# Altium PCB PCB EMS.PcbDoc
Units mm, origin at the board's own origin, x right, y up, seen from the top; angles counter-clockwise.
Board outline 25 x 25 mm, 2 copper layers (Top Layer, Bottom Layer), stack 0.325 mm thick; 19 components, 10 nets, 37 pads, 10 vias.
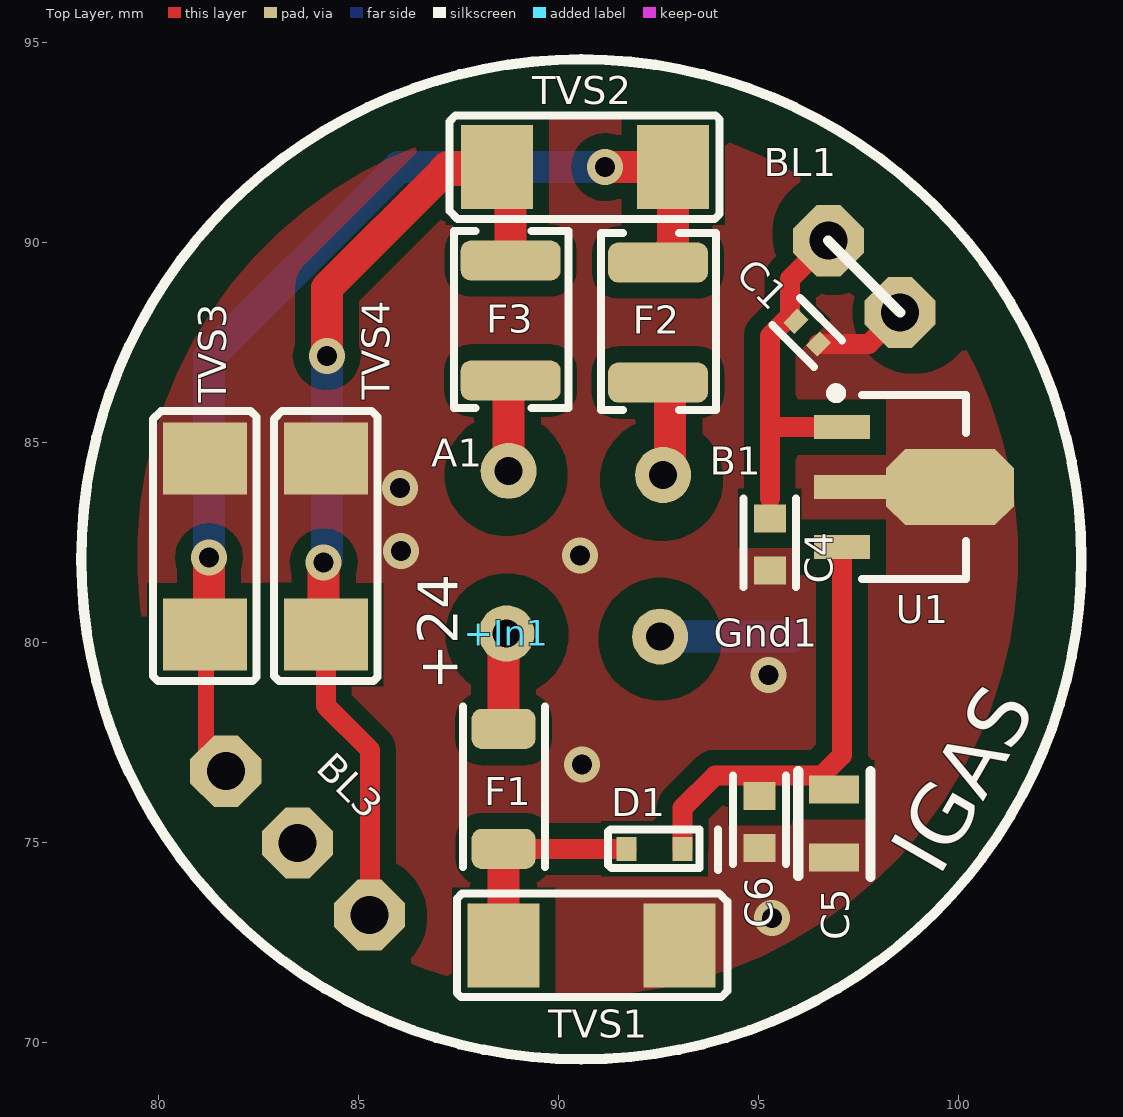
[diagram p0: Top Layer view]
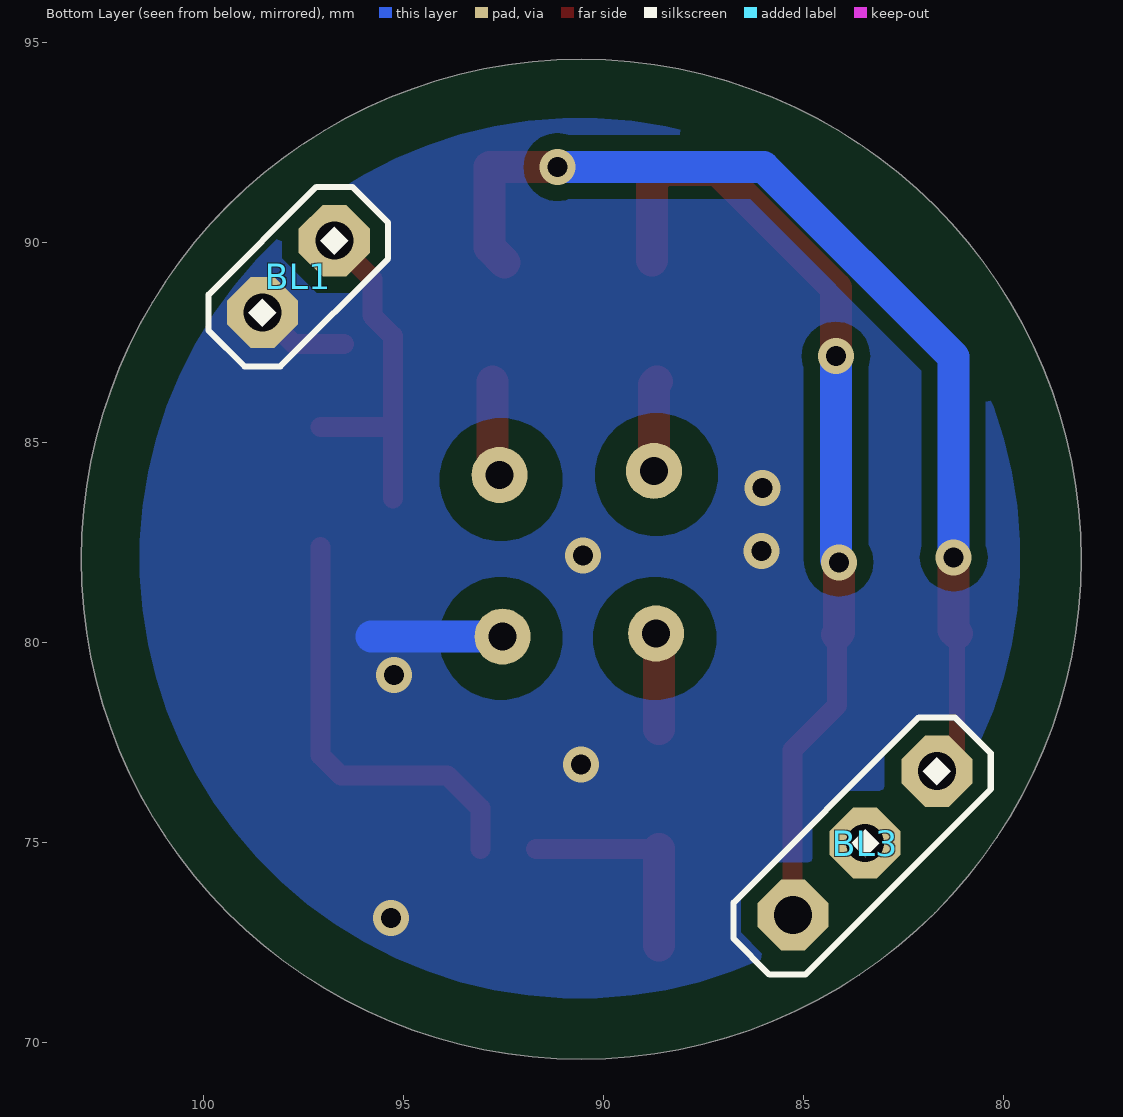
[diagram p1: Bottom Layer view, seen from below]
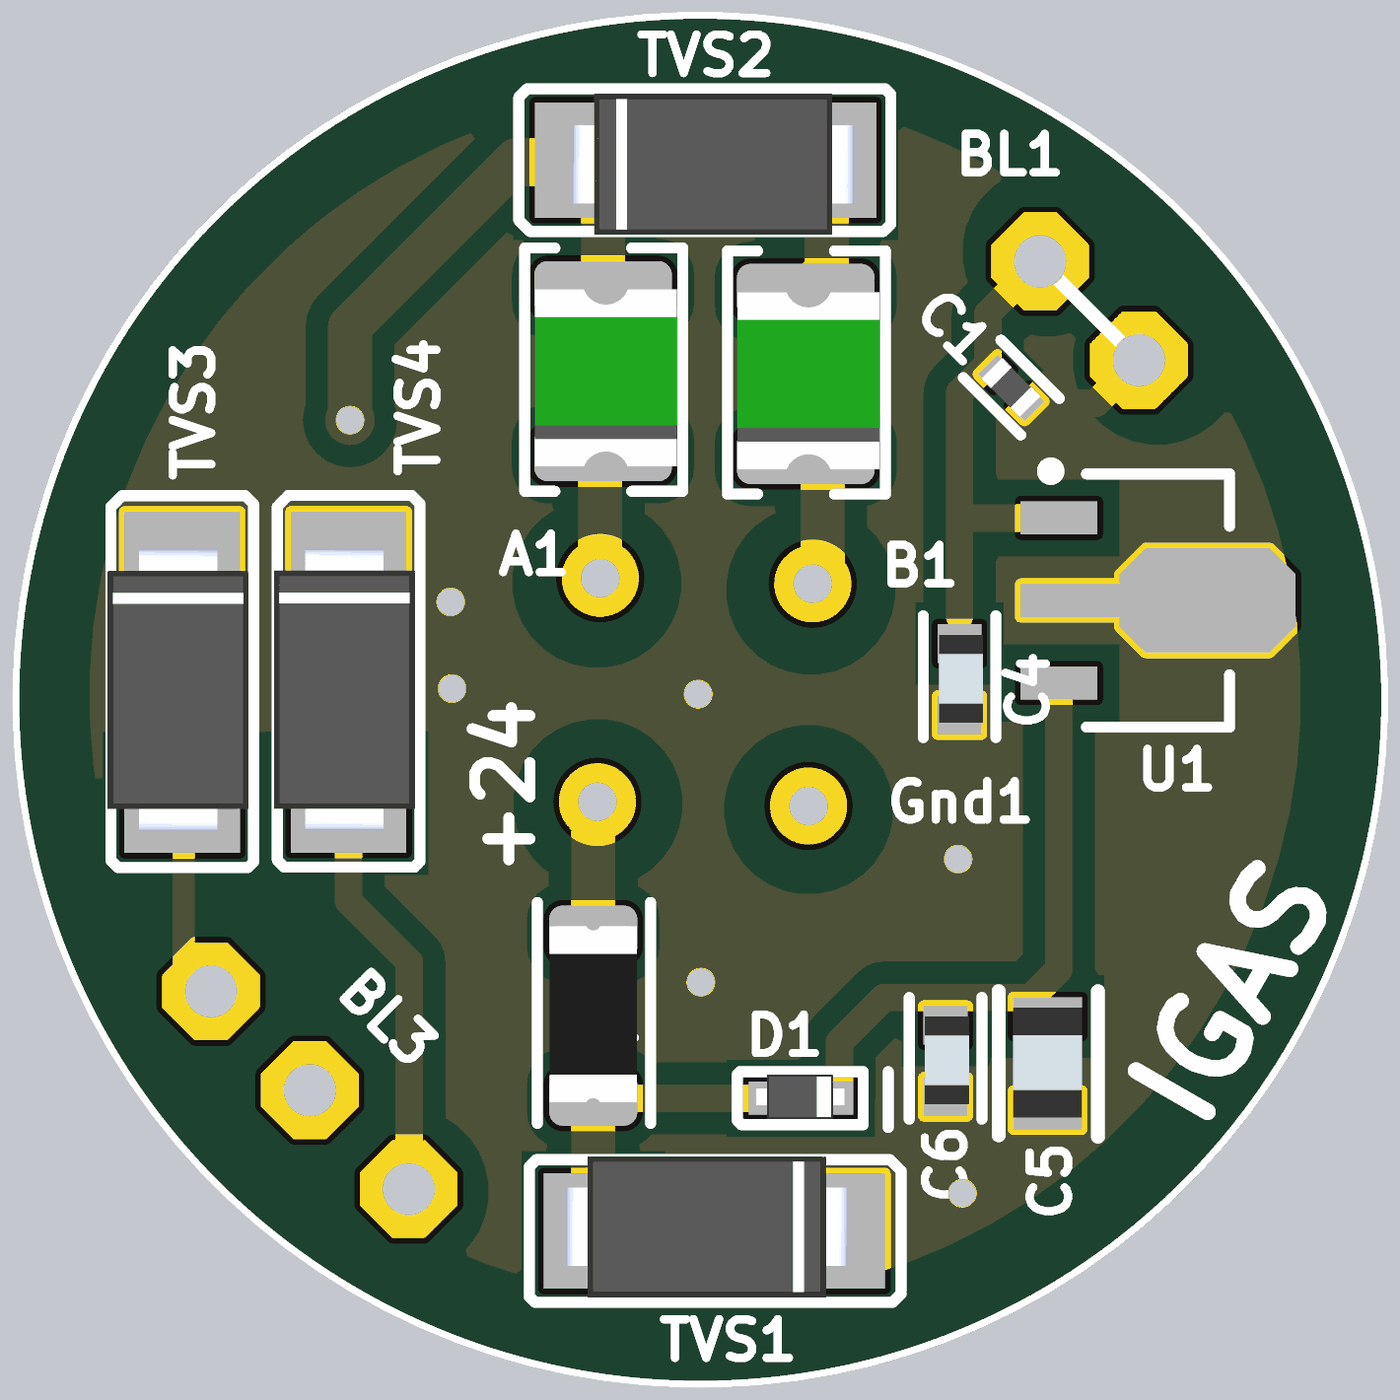
[diagram p2: 3D render of the assembled board from above, using the file's embedded part models]

## Layer stack, top to bottom
Top Solder: solder mask 0.0102, Solder Resist, Dk 3.5
Top Layer: signal copper 0.0356
Dielectric 1: core 0.254, FR-4, Dk 4.2
Bottom Layer: signal copper 0.0356
Bottom Solder: solder mask 0.0102, Solder Resist, Dk 3.5

## Board outline
78.064,82.067 ccw(c90.564,82.067) 90.564,69.567 ccw(c90.564,82.067) 103.064,82.067 ccw(c90.564,82.067) 90.564,94.567 ccw(c90.564,82.067)

## Design rules (kind name [scope] priority, off if disabled: settings)
AssemblyTestPointUsage [All] p1 off:
AssemblyTestpoint [All] p1 off: testpointundercomponent=TRUE minsize=1.016 maxsize=2.54 preferedsize=1.524 minholesize=0 maxholesize=1.016 preferedholesize=0.813 testpointgrid=0.025 usegrid=TRUE gridtolerance=0 allowsidetop=TRUE allowsidebottom=TRUE
Clearance Clearance_1 [All] p1: gap=0.4 ignorepadtopadclearanceinfootprint=FALSE
ComponentClearance [All] p1 off: gap=0.254 collisioncheckmode=3 verticalgap=0.254 showdistances=FALSE
DiffPairsRouting [All] p1 off: maxlimit=0.254 minlimit=0.254 mostfreqgap=0.254 toplayer_minwidth=0.381 toplayer_maxwidth=0.381 toplayer_prefwidth=0.381 bottomlayer_minwidth=0.381 bottomlayer_maxwidth=0.381 bottomlayer_prefwidth=0.381 maxuncoupledlength=12.7
FabricationTestPointUsage [All] p1 off: valid=0 allowmultiple=FALSE
FabricationTestpoint [All] p1 off: side=3 testpointundercomponent=TRUE minsize=1.016 maxsize=2.54 preferedsize=1.524 minholesize=0 maxholesize=1.016 preferedholesize=0.813 testpointgrid=0.025 allowsidetop=TRUE allowsidebottom=TRUE usegrid=TRUE gridtolerance=0
FanoutControl Fanout_BGA [IsBGA] p1 off: bgadir=Out bgaviamode=Centered fanoutstyle=Auto fanoutdirection=Alternating viagrid=0.025 // Fanout_BGA (Default Rule)
FanoutControl Fanout_LCC [IsLCC] p2 off: bgadir=Out bgaviamode=Centered fanoutstyle=Auto fanoutdirection=Alternating viagrid=0.025 // Fanout_LCC (Default Rule)
FanoutControl Fanout_SOIC [IsSOIC] p3 off: bgadir=Out bgaviamode=Centered fanoutstyle=Auto fanoutdirection=Alternating viagrid=0.025 // Fanout_SOIC (Default Rule)
FanoutControl Fanout_Small [(CompPinCount < 5)] p4 off: bgadir=Out bgaviamode=Centered fanoutstyle=Auto fanoutdirection=OutThenIn viagrid=0.025 // Fanout_Small (Default Rule)
FanoutControl Fanout_Default [All] p5 off: bgadir=Out bgaviamode=Centered fanoutstyle=Auto fanoutdirection=Alternating viagrid=0.025 // Fanout_Default (Default Rule)
Height [All] p1 off: minheight=0 maxheight=25.4 prefheight=12.7
HoleToHoleClearance [All] p1 off: gap=0.254 allowstackedmicrovias=TRUE
LayerPairs [All] p1 off: enforce=TRUE
MinimumSolderMaskSliver [All] p1 off: minsoldermaskwidth=0.254
NetAntennae [All] p1 off: netantennaetolerance=0
PasteMaskExpansion [All] p1 off: expansion=0
PlaneClearance [All] p1: clearance=0.6
PlaneConnect [All] p1: planeconnectstyle=Direct reliefexpansion=0.508 reliefentries=4 reliefconductorwidth=0.254 reliefairgap=0.254
PolygonConnect [All] p1: connectstyle=Direct reliefconductorwidth=0.5 reliefentries=4 polygonreliefangle="90 Angle" airgapwidth=0.5
RoutingCorners [All] p1 off: cornerstyle=45-Degree minsetback=2.54 maxsetback=2.54
RoutingLayers [All] p1 off: top layer_v5=TRUE bottom layer_v5=TRUE
RoutingPriority [All] p1 off: routingpriority=0
RoutingTopology [All] p1 off: topology=Shortest
RoutingVias [All] p1: holewidth=0.411 width=1.27 viastyle="Through Hole" minholewidth=0.411 minwidth=0.6 maxholewidth=0.911 maxwidth=1.6
ShortCircuit [InNet('No Net') And OnLayer('Top Layer') vs InNet('No Net') And OnLayer('Top Layer')] p1 off: allowed=FALSE
SilkToBoardRegionClearance [All] p1 off:
SilkToSilkClearance [All] p1 off: silktosilkclearance=0.254
SilkToSolderMaskClearance [IsPad] p1 off: minsilkscreentomaskgap=0.254 clearancetoexposedcopper=TRUE
SolderMaskExpansion [All] p1 off: expansion=0.102
UnpouredPolygon [All] p1 off: allowunpoured=TRUE allowshelved=TRUE
Width [All] p1: maxlimit=0.8 minlimit=0.22 preferedwidth=0.254
2 further rules are at their usual default settings.

## Classes and differential pairs
component class RS485: A1 B1 C1 F2 F3 TVS2 TVS3 TVS4
component class PowerSupply: +In C4 C5 C6 D1 F1 Gnd1 Gnd_VIP1 TVS1 U1
component class Interconnectors: BL1 BL3

## Components (designator, comment, footprint, x,y, rotation, side; value= is the part's Value field where it differs from the comment)
+In1 "PIN_Wire" PIN_wire 88.697,80.213 r90 top
A1 "PIN_Wire" PIN_wire 88.748,84.277 r90 top
B1 "PIN_Wire" PIN_wire 92.608,84.176 r90 top
BL1 "BL?" 2pin 96.74,90.032 r45 bottom
BL3 "BL?" PIN3x1 81.676,76.77 r45 bottom
C1 "100n" 0402 96.495,87.452 r45 top
C4 "2.2u" 0603 95.275,81.788 r0 top
C5 "0.1u" 0805 96.876,74.612 r0 top
C6 "1u" 0603 95.021,74.854 r0 top
D1 "BAS516" SOD523 93.091,74.828 r180 top
F1 "MF-NSMF012-2" "FUSE MF12" 88.621,74.828 r90 top
F2 "Fuse PTS" "Fuse USMF005" 92.481,89.487 r270 top
F3 "Fuse PTS" "Fuse USMF005" 88.798,89.538 r270 top
Gnd1 "PIN_Wire" PIN_wire 92.532,80.137 r180 top
TVS1 "SMAJ5.0CA" DO-214AC 93.021,72.415 r180 top
TVS2 "SMAJ5.0CA" DO-214AC 88.462,91.872 r0 top
TVS3 "SMAJ5.0CA" DO-214AC 81.153,84.582 r270 top
TVS4 "SMAJ5.0CA" DO-214AC 84.176,84.588 r270 top
U1 "L78L05ACUTR" SOT89N 98.882,83.871 r0 top

## Footprints (in the part's own frame and the unit in brackets; to place one, negate y for a bottom-side part, rotate by r counter-clockwise, add the part's x,y. Pads: shape width x height; smd on the part's side, far side on the other; paste and mask are expansions set on the pad)
2pin [mil]
  oct 66x66 hole 37.4: 1(0,0) 2(0,100)
  silkscreen extent -50,-50 50,150
0402 [mm]
  rect 0.5x0.4 smd: 1(0,0)
  rect 0.5x0.4 smd paste+0: 2(0,0.8)
  silkscreen extent -0.48,-0.36 0.48,1.14, body extent -0.27,-0.09 0.28,0.91, height 0.25
0603 [mm]
  rect 0.8x0.7 smd mask+0.102: 1(0,0) 2(0,1.3)
  silkscreen extent -0.66,-0.41 0.66,1.8, body extent -0.37,-0.14 0.43,1.46, height 0.5
0805 [mm]
  rect 1.25x0.7 smd: 1(0,0) 2(0,1.7)
  silkscreen extent -0.89,-0.48 0.91,2.16, body extent -0.63,-0.14 0.62,1.86, height 0.63
DO-214AC [mm]
  rect 1.8x2.1 smd: 1(0,0) 2(4.4,0)
  silkscreen extent -1.19,-1.3 5.56,1.3, body extent -0.23,-1.36 4.91,1.2, height 2.5
"FUSE MF12" [mm]
  rrect50% 1x1.6 smd: 0(0,0) 1(3,0)
  silkscreen extent -0.46,-1.04 3.56,1.02, body extent -0.08,-0.79 3.12,0.79, height 0.89
"Fuse USMF005" [mm]
  rrect50% 1x2.5 smd: 0(0,0) 1(3,0)
  silkscreen extent -0.74,-1.42 3.68,1.45, body extent 0.02,-1.24 3.23,1.34, height 1.2
PIN3x1 [mil] "Pin3x1"
  oct 66x66 hole 37.4: 1(0,0) 2(0,100) 3(0,200)
  silkscreen extent -50,-50 50,258
PIN_wire [mm]
  round 1.4 hole 0.7: 0(0,0)
SOD523 [mm]
  rect 0.5x0.6 smd: 1(0,0) 2(1.397,0)
  silkscreen extent -0.89,-0.48 1.85,0.53, body extent -0.09,-0.43 1.51,0.37, height 0.65
SOT89N [mm] "SOT89, 3-Leads, Body 4.5x2.4 mm, Pitch 1.5mm, Lead Span 4.1mm, IPC Medium Density"
  rect 1.4x0.6 smd: 1(-1.8,1.5) 3(-1.8,-1.5)
  rect 1.8x0.6 smd: 2(-1.6,0)
  oct 3.2x1.9 smd: 2(0.9,0)
  silkscreen extent -2.07,-2.3 1.3,2.47, body extent -1.3,-2.3 1.3,2.3, height 1.6

## Part data
+In1 A1 B1 Gnd1: "pin"
BL1: library part "2.54 2pin"
BL3: library part "2.54 3pin"
C1: library part "0805 Cap", "C1005X7R1H104K050BB"
C4: library part "Capasitor 0805", "GRM188R61E225KA12D"
C5: library part "Capasitor 0805", "CC0805KRX7R9BB104"
C6: library part "Capasitor 0805", "CC0603KRX7R9BB105"
F1: library part "Fuse PTS"
F2 F3: "MF-USMF005-2"
TVS1 TVS2 TVS3 TVS4: "SMAJ30CA"
U1: library part LDO_SOT89, "SOT-89"

## Via types
v1: diameter 0.9, hole 0.5, Top Layer to Bottom Layer, tented both sides, 10 vias

## Nets (pads, with @x,y where several pads share a name; then routed paths per layer and width w, separated by ;. In a path a pad name is that pad's centre, name@x,y a point inside that pad or via, vN(x,y) a via of type N, cw(c..) or ccw(c..) an arc to the next point about the centre after c; other vN are vias at no path point)
+5V: BL1.1 C1.2 C4.2 U1.1 | length 8.9
  Top Layer w0.5: 95.275,83.591 95.275,85.344 ; BL1.1 95.787,89.079 95.787,88.159 95.275,87.647 95.275,85.344 ; U1.1 95.302,85.371 95.275,85.344
GND: BL1.2 C1.1 C4.1 C5.1 C6.1 Gnd1.0 TVS1.1 TVS3.1 TVS4.1 U1.2 | length 5.6
  Top Layer w0.5: C1.1 97.753,87.452 BL1.2
  Bottom Layer w0.8: Gnd1.0 95.809,80.137
  other v1: 95.326,73.101 90.576,76.937 95.25,79.172 90.526,82.169 86.055,82.271 86.03,83.845
Net+In1_0: +In1.0 F1.1 | length 2.4
  Top Layer w0.8: F1.1 88.621,80.137 +In1.0
NetA1_0: A1.0 F3.1 | length 2.3
  Top Layer w0.8: F3.1@88.671,86.512 88.748,86.436 A1.0
NetB1_0: B1.0 F2.1 | length 2.4
  Top Layer w0.8: B1.0 92.786,84.353 F2.1@92.786,86.51
NetC5_2: C5.2 C6.2 D1.1 U1.3 | length 10.8
  Top Layer w0.5: D1.1 93.091,75.844 93.904,76.657 96.571,76.657 97.082,77.169 U1.3
NetD1_2: D1.2 F1.0 TVS1.2 | length 5.5
  Top Layer w0.5: F1.0 D1.2
  Top Layer w0.8: TVS1.2 F1.0
RS_A: BL3.3 F3.0 TVS2.1 TVS4.2 | length 25.4
  Top Layer w0.5: TVS4.2 84.176,78.41 85.279,77.306 BL3.3@85.279,73.19
  Top Layer w0.8: v1(84.125,81.991) 84.125,80.239 TVS4.2 ; v1(84.201,87.147) 84.201,88.849 87.147,91.796 ; TVS2.1@88.386,91.796 87.147,91.796 ; F3.0 88.798,91.536 TVS2.1 87.224,91.872 87.147,91.796
  Bottom Layer w0.8: v1(84.125,81.991) 84.201,82.067 v1(84.201,87.147)
RS_B: BL3.1 F2.0 TVS2.2 TVS3.2 | length 26.6
  Top Layer w0.4: TVS3.2@81.178,80.213 81.178,77.267 BL3.1
  Top Layer w0.8: TVS3.2@81.178,80.213 81.255,80.289 v1(81.255,82.118) ; v1(91.161,91.872) TVS2.2 92.862,89.868 F2.0
  Bottom Layer w0.8: v1@81.255,82.144 81.255,86.995 ; 81.255,87.122 86.004,91.872 v1(91.161,91.872)
RS_ENABLE: BL3.2 | length 0.3
  Top Layer w0.35: BL3.2@83.128,74.721 BL3.2@83.312,74.905

## Polygon pours and split planes (outlines as drawn)
GND on Bottom Layer "Top Layer-No Net" (solid, remove dead copper, pour order 29): 79.599,82.095 ccw(c90.599,82.095) 90.599,71.095 ccw(c90.599,82.095) 101.599,82.095 ccw(c90.599,82.095) 90.599,93.095 ccw(c90.599,82.095)
GND on Top Layer "Top Layer-No Net" (solid, remove dead copper, pour order 31): 79.473,82.148 ccw(c90.473,82.148) 90.473,71.148 ccw(c90.473,82.148) 101.473,82.148 ccw(c90.473,82.148) 90.473,93.148 ccw(c90.473,82.148)

## Other copper
Top Layer:
  pour cut-out: 86.717,73.129 ccw(c85.185,73.129) 85.185,74.661 ccw(c85.185,73.129) 83.653,73.129 ccw(c85.185,73.129) 85.185,71.596 ccw(c85.185,73.129)
  pour cut-out: 85.001,74.943 ccw(c83.469,74.943) 83.469,76.475 ccw(c83.469,74.943) 81.936,74.943 ccw(c83.469,74.943) 83.469,73.411 ccw(c83.469,74.943)
  pour cut-out: 83.157,76.745 ccw(c81.625,76.745) 81.625,78.278 ccw(c81.625,76.745) 80.092,76.745 ccw(c81.625,76.745) 81.625,75.213 ccw(c81.625,76.745)
  pour cut-out: 100.401,88.235 ccw(c98.869,88.235) 98.869,89.768 ccw(c98.869,88.235) 97.337,88.235 ccw(c98.869,88.235) 98.869,86.703 ccw(c98.869,88.235)
  pour cut-out: 98.396,90.206 ccw(c96.864,90.206) 96.864,91.739 ccw(c96.864,90.206) 95.331,90.206 ccw(c96.864,90.206) 96.864,88.674 ccw(c96.864,90.206)
  pour cut-out: 94.066,80.073 ccw(c92.533,80.073) 92.533,81.605 ccw(c92.533,80.073) 91.001,80.073 ccw(c92.533,80.073) 92.533,78.54 ccw(c92.533,80.073)
  pour cut-out: 90.238,80.179 ccw(c88.705,80.179) 88.705,81.712 ccw(c88.705,80.179) 87.173,80.179 ccw(c88.705,80.179) 88.705,78.647 ccw(c88.705,80.179)
  pour cut-out: 94.105,84.06 ccw(c92.572,84.06) 92.572,85.593 ccw(c92.572,84.06) 91.04,84.06 ccw(c92.572,84.06) 92.572,82.528 ccw(c92.572,84.06)
  pour cut-out: 90.217,84.185 ccw(c88.685,84.185) 88.685,85.718 ccw(c88.685,84.185) 87.152,84.185 ccw(c88.685,84.185) 88.685,82.653 ccw(c88.685,84.185)
Bottom Layer:
  pour cut-out: 91.04,84.06 ccw(c92.572,84.06) 92.572,82.528 ccw(c92.572,84.06) 94.105,84.06 ccw(c92.572,84.06) 92.572,85.593 ccw(c92.572,84.06)
  pour cut-out: 87.152,84.185 ccw(c88.685,84.185) 88.685,82.653 ccw(c88.685,84.185) 90.217,84.185 ccw(c88.685,84.185) 88.685,85.718 ccw(c88.685,84.185)
  pour cut-out: 91.043,80.091 ccw(c92.575,80.091) 92.575,78.558 ccw(c92.575,80.091) 94.108,80.091 ccw(c92.575,80.091) 92.575,81.623 ccw(c92.575,80.091)
  pour cut-out: 87.196,80.091 ccw(c88.728,80.091) 88.728,78.558 ccw(c88.728,80.091) 90.26,80.091 ccw(c88.728,80.091) 88.728,81.623 ccw(c88.728,80.091)

## Silkscreen, mask and mechanical layers (free items; w line width, h text height)
Top Overlay:
  circle w0.254: c90.564,82.067 r12.5
  lines w0.254: 96.733,90.036 98.529,88.24 ; 96.74,90.032 98.536,88.236
  text "+24" at 87.478,78.791 h1 r90
  text "IGAS" at 99.517,74.092 h1.5 r60